# Altium PCB RF Transceiver PCB.PcbDoc
Units mm, origin at the board's own origin, x right, y up, seen from the top; angles counter-clockwise.
Board outline 50.16 x 17.42 mm, 4 copper layers (Top Layer, GND, 3V3, Bottom Layer), stack 0.603 mm thick; 40 components, 34 nets, 171 pads, 62 vias.
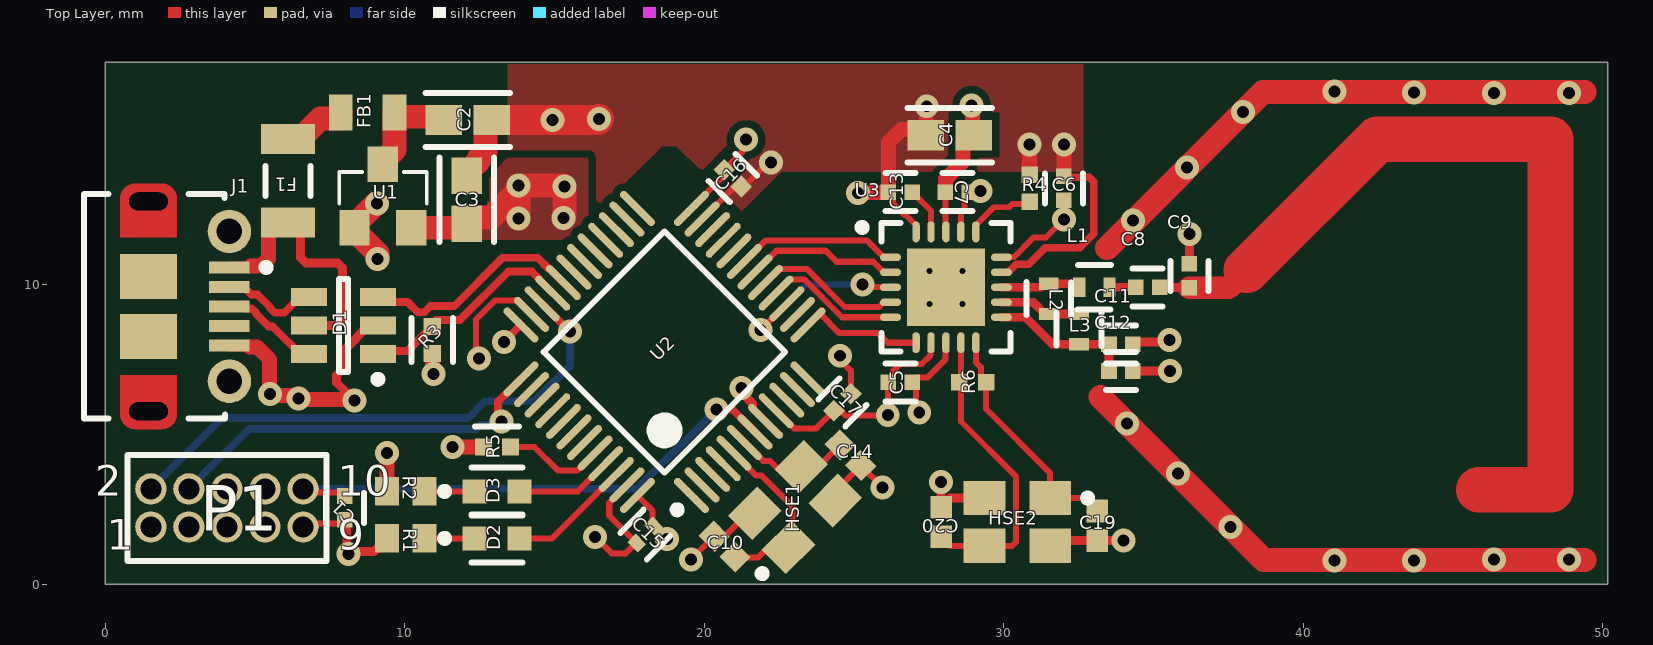
[diagram p0: Top Layer view]
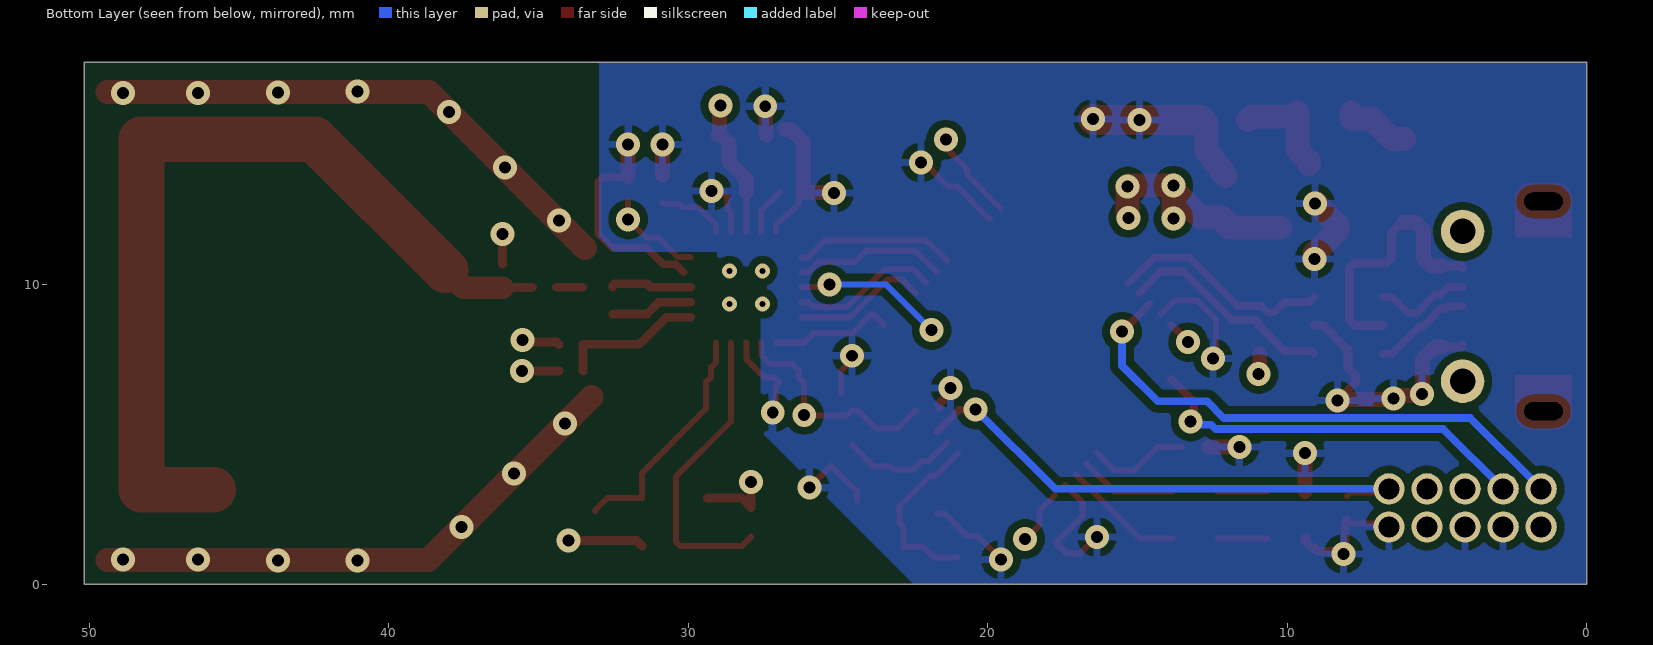
[diagram p1: Bottom Layer view, seen from below]
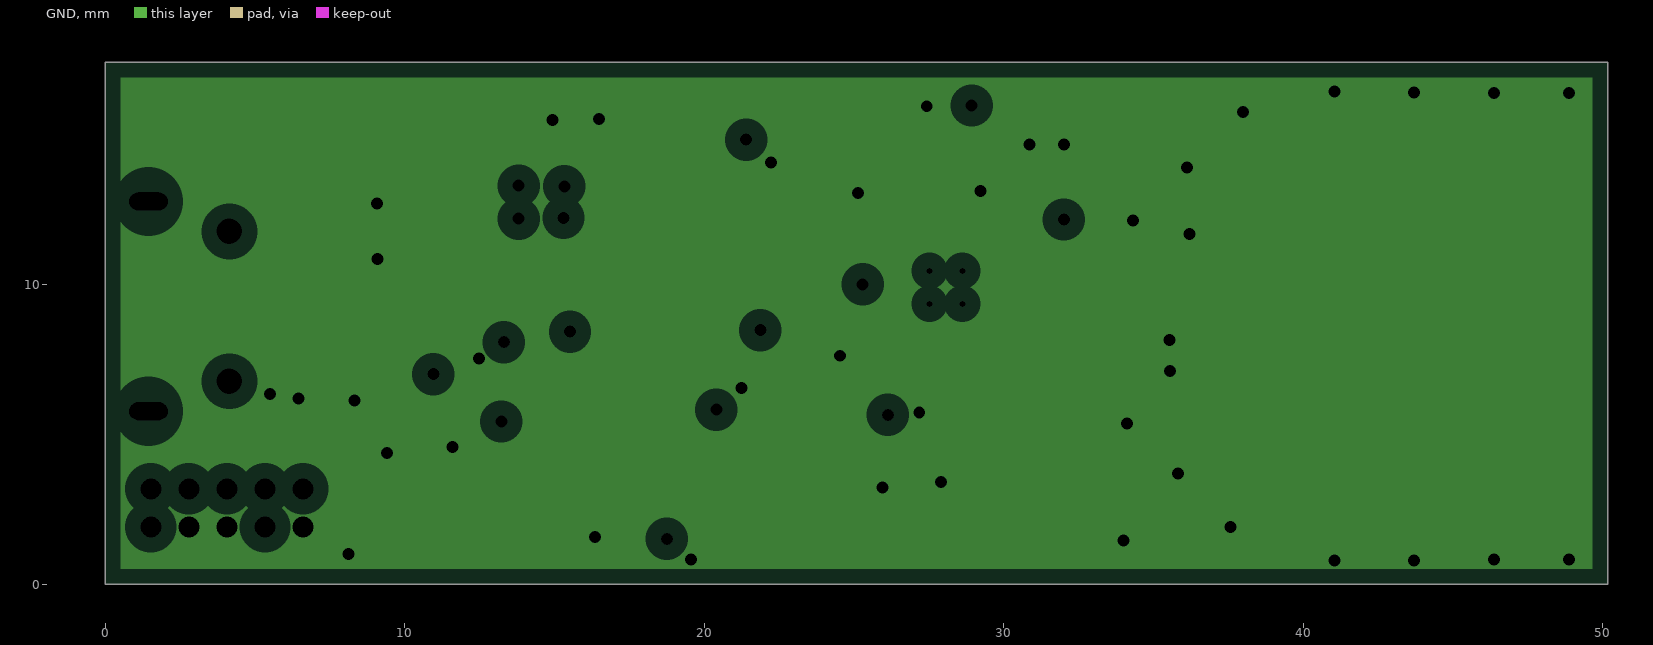
[diagram p2: GND, clearances drawn from the general rule]
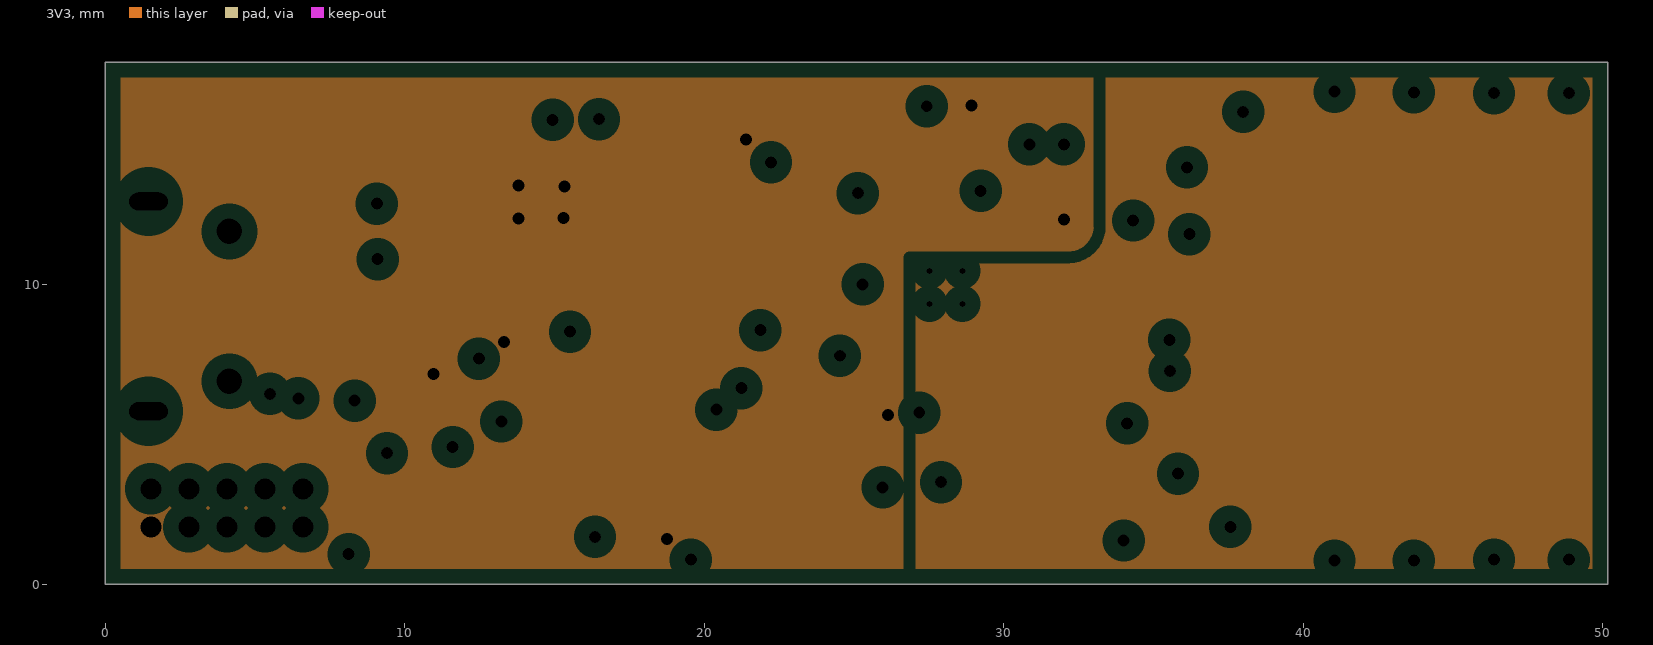
[diagram p3: 3V3, clearances drawn from the general rule]
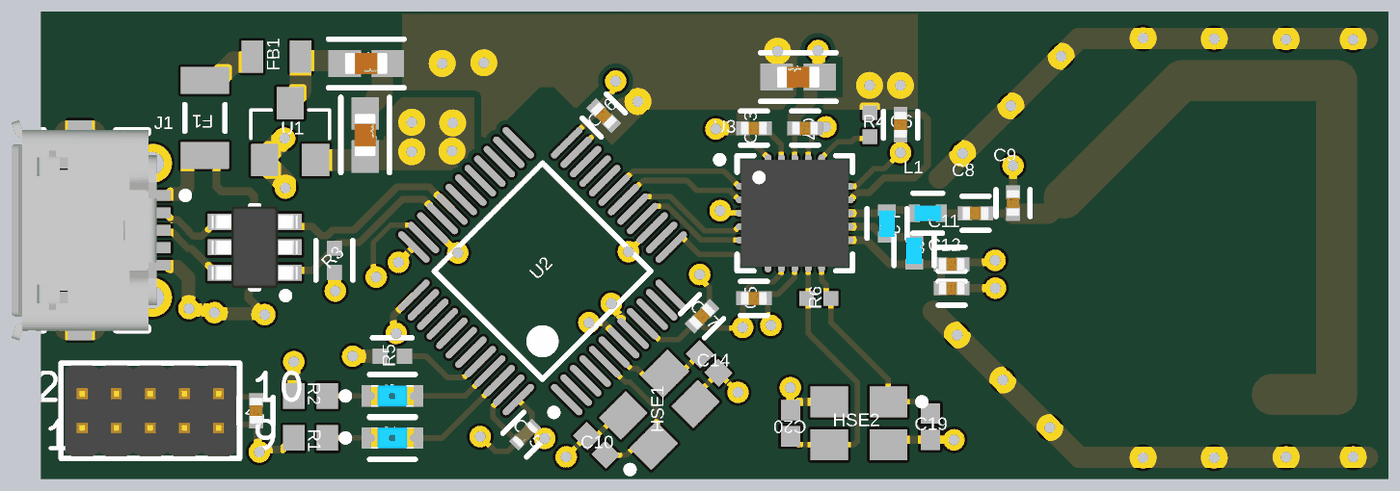
[diagram p4: 3D render of the assembled board from above, using the file's embedded part models]

## Layer stack, top to bottom
Top Solder: solder mask 0.0102, Solder Resist, Dk 3.5
Top Layer: signal copper 0.0356
Dielectric 2: prepreg 0.0711, PP-006, Dk 4.1
GND: plane copper 0.035, net GND
Dielectric 1: dielectric 0.32, FR-4, Dk 4.8
3V3: plane copper 0.035, net +3.3
Dielectric 3: prepreg 0.0711, PP-006, Dk 4.1
Bottom Layer: signal copper 0.0356
Bottom Solder: solder mask 0.0102, Solder Resist, Dk 3.5

## Board outline
0,0 50.165,0 50.165,17.425 0,17.425

## Design rules (kind name [scope] priority, off if disabled: settings)
Clearance Clearance_3 [InNamedPolygon('GND_L04_P001')] p1: gap=0.254 ignorepadtopadclearanceinfootprint=FALSE except(0: Arc-Hole Track-Hole SMDPad-Hole THPad-Hole Via-Hole Fill-Hole Poly-Hole Region-Hole Text-Hole)
Clearance Clearance_2 [InNamedPolygon('GND_L01_P002')] p2: gap=0.254 ignorepadtopadclearanceinfootprint=FALSE except(0: Arc-Hole Track-Hole SMDPad-Hole THPad-Hole Via-Hole Fill-Hole Poly-Hole Region-Hole Text-Hole)
Clearance Clearance_1 [InNamedPolygon('+3.3_L01_P000')] p3: gap=0.254 ignorepadtopadclearanceinfootprint=FALSE except(0: Arc-Hole Track-Hole SMDPad-Hole THPad-Hole Via-Hole Fill-Hole Poly-Hole Region-Hole Text-Hole)
Clearance [All] p4 off: gap=0.24 ignorepadtopadclearanceinfootprint=TRUE except(0: Arc-Hole Track-Hole SMDPad-Hole THPad-Hole Via-Hole Fill-Hole Poly-Hole Region-Hole Text-Hole)
DiffPairsRouting DiffPair_DiffPairsRouting [InDifferentialPairClass('D2')] p1: maxlimit=0.203 minlimit=0.203 mostfreqgap=0.203 toplayer_minwidth=0.261 toplayer_maxwidth=0.261 toplayer_prefwidth=0.261 bottomlayer_minwidth=0.261 bottomlayer_maxwidth=0.261 bottomlayer_prefwidth=0.261 maxuncoupledlength=12.7
DiffPairsRouting DiffPair_D2DiffPairsRouting [InDifferentialPairClass('D2')] p2: maxlimit=0.203 minlimit=0.203 mostfreqgap=0.203 toplayer_minwidth=0.261 toplayer_maxwidth=0.261 toplayer_prefwidth=0.261 bottomlayer_minwidth=0.261 bottomlayer_maxwidth=0.261 bottomlayer_prefwidth=0.261 maxuncoupledlength=12.7
DiffPairsRouting DiffPair_DDiffPairsRouting [InDifferentialPairClass('D')] p3: maxlimit=0.203 minlimit=0.203 mostfreqgap=0.203 toplayer_minwidth=0.261 toplayer_maxwidth=0.261 toplayer_prefwidth=0.261 bottomlayer_minwidth=0.261 bottomlayer_maxwidth=0.261 bottomlayer_prefwidth=0.261 maxuncoupledlength=12.7
MatchedLengths DiffPair_MatchedLengths [InDifferentialPairClass('D2')] p1: tolerance=25.4 checknetsindiffpair=FALSE checkdiffpairvsdiffpair=TRUE checkxsignals=TRUE checkothers=TRUE
MatchedLengths DiffPair_D2MatchedLengths [InDifferentialPairClass('D2')] p2: tolerance=25.4 checknetsindiffpair=FALSE checkdiffpairvsdiffpair=TRUE checkxsignals=TRUE checkothers=TRUE
MatchedLengths DiffPair_DMatchedLengths [InDifferentialPairClass('D')] p3: tolerance=25.4 checknetsindiffpair=FALSE checkdiffpairvsdiffpair=TRUE checkxsignals=TRUE checkothers=TRUE
PlaneClearance [All] p1: clearance=0.508
PlaneConnect [All] p1: planeconnectstyle=Relief reliefexpansion=0.508 reliefentries=4 reliefconductorwidth=0.254 reliefairgap=0.254
PolygonConnect PolygonConnect_11 [All vs IsNamedPolygon('GND_L04_P001')] p1: connectstyle=Relief reliefconductorwidth=0.254 reliefentries=4 polygonreliefangle="90 Angle" airgapwidth=0.254
PolygonConnect PolygonConnect_10 [All vs IsNamedPolygon('GND_L01_P002')] p2: connectstyle=Direct reliefconductorwidth=0.254 reliefentries=4 polygonreliefangle="90 Angle" airgapwidth=0.254
PolygonConnect PolygonConnect_9 [All vs IsNamedPolygon('GND_L01_P002')] p3: connectstyle=Direct reliefconductorwidth=0.254 reliefentries=4 polygonreliefangle="90 Angle" airgapwidth=0.254
PolygonConnect PolygonConnect_8 [All vs IsNamedPolygon('+3.3_L01_P000')] p4: connectstyle=Direct reliefconductorwidth=0.254 reliefentries=4 polygonreliefangle="90 Angle" airgapwidth=0.254
PolygonConnect PolygonConnect_7 [All vs IsNamedPolygon('+3.3_L01_P000')] p5: connectstyle=Relief reliefconductorwidth=0.254 reliefentries=4 polygonreliefangle="90 Angle" airgapwidth=0.254
PolygonConnect PolygonConnect_6 [All vs IsNamedPolygon('GND_L01_P002')] p6: connectstyle=Relief reliefconductorwidth=0.254 reliefentries=4 polygonreliefangle="90 Angle" airgapwidth=0.254
PolygonConnect PolygonConnect_5 [All vs IsNamedPolygon('GND_L01_P002')] p7: connectstyle=Direct reliefconductorwidth=0.254 reliefentries=4 polygonreliefangle="90 Angle" airgapwidth=0.254
PolygonConnect PolygonConnect_4 [All vs IsNamedPolygon('+3.3_L01_P000')] p8: connectstyle=Direct reliefconductorwidth=0.254 reliefentries=4 polygonreliefangle="90 Angle" airgapwidth=0.254
PolygonConnect PolygonConnect_3 [All vs IsNamedPolygon('GND_L01_P001')] p9: connectstyle=Direct reliefconductorwidth=0.254 reliefentries=4 polygonreliefangle="90 Angle" airgapwidth=0.254
PolygonConnect PolygonConnect_2 [All vs IsNamedPolygon('+3.3_L01_P000')] p10: connectstyle=Relief reliefconductorwidth=0.254 reliefentries=4 polygonreliefangle="90 Angle" airgapwidth=0.254
PolygonConnect PolygonConnect_1 [All vs IsNamedPolygon('+3.3_L01_P000')] p11: connectstyle=Direct reliefconductorwidth=0.254 reliefentries=4 polygonreliefangle="90 Angle" airgapwidth=0.254
PolygonConnect [All] p12: connectstyle=Relief reliefconductorwidth=0.254 reliefentries=4 polygonreliefangle="90 Angle" airgapwidth=0.254
RoutingVias [All] p1: holewidth=0.4 width=0.8 viastyle="Through Hole" minholewidth=0.4 minwidth=0.7 maxholewidth=0.4 maxwidth=0.8
SilkToSilkClearance [All] p1 off: silktosilkclearance=0.254
SilkToSolderMaskClearance [IsPad] p1 off: minsilkscreentomaskgap=0.254 clearancetoexposedcopper=TRUE
SolderMaskExpansion [All] p1: expansion=0.102 istentingtop=FALSE
UnRoutedNet [All] p1: checkbadconnections=TRUE
Width [All] p1: maxlimit=1.524 minlimit=0.1 preferedwidth=0.293 minimp=50.000000 maximp=50.000000 favimp=50.000000
24 further rules are at their usual default settings.

## Classes and differential pairs
differential pair class D: D
differential pair class D2: USB
differential pair USB: +USB_P -USB_N
differential pair D: +D_P -D_N

## Components (designator, comment, footprint, x,y, rotation, side; value= is the part's Value field where it differs from the comment)
C1 "100n 0402" FP-C0402-BB-MFG 8.001,2.54 r270 top value="0.10 μF"
C2 "10u 0603" FP-GRM188-0_1-e0_2_0_55-IPC_A 12.105,15.494 r0 top
C3 "10u 0603" FP-GRM188-0_1-e0_2_0_55-IPC_A 12.065,12.827 r90 top
C4 "10u 0603" FP-GRM188-0_1-e0_2_0_55-IPC_A 28.194,14.986 r180 top
C5 "10n 0402" FP-C0402-BB-MFG 26.543,6.731 r0 top value="0.10 μF"
C6 "10n 0402" FP-C0402-BB-MFG 32.004,13.208 r90 top value="0.10 μF"
C7 "10n 0402" FP-C0402-BB-MFG 28.448,13.081 r0 top value="0.10 μF"
C8 "1.5p 0402" FP-C0402-BB-MFG 34.798,9.906 r0 top value="0.10 μF"
C9 "1.0p 0402" FP-C0402-BB-MFG 36.195,10.287 r90 top value="0.10 μF"
C10 "12pf 0402" CAPC1005X55X25ML05T10 20.675,1.25 r315 top
C11 "2.2n 0402" FP-C0402-BB-MFG 33.909,8.001 r0 top value="0.10 μF"
C12 "4.7n 0402" FP-C0402-BB-MFG 33.909,7.112 r0 top value="0.10 μF"
C13 "33n 0402" FP-C0402-BB-MFG 26.543,13.081 r180 top value="0.10 μF"
C14 "12pf 0402" CAPC1005X55X25ML05T10 24.875,4.3 r135 top
C15 "1u 0402" FP-GRM15-0_1-MFG 18.025,1.65 r225 top value=1uF
C16 "100n 0402" FP-C0402-BB-MFG 20.95,13.55 r315 top value="0.10 μF"
C17 "100n 0402" FP-C0402-BB-MFG 24.609,6.067 r45 top value="0.10 μF"
C19 "12pf 0402" CAPC1005X55X25ML05T10 33.114,1.945 r90 top
C20 "12pf 0402" CAPC1005X55X25ML05T10 27.907,2.072 r270 top
D1 "USBLC6-2SC6" STM-SOT23-6L_V 7.95,8.636 r180 top
D2 "LED 0603" FP-LTST-C191TBKT-MFG 13.081,1.524 r0 top
D3 "LED 0603" FP-LTST-C191TBKT-MFG 13.081,3.091 r0 top
F1 "1206L012WR" LFUS-1206L012WR_V 6.096,13.462 r90 top
FB1 "MPZ2012S101A" TDK-MPZ2012S101A-2_V 8.763,15.748 r0 top
HSE1 "X322516MLB4SI" EPSON-TSX-3225_V 23.025,2.575 r45 top
HSE2 "X322516MLB4SI" EPSON-TSX-3225_V 30.447,2.072 r180 top
J1 "105017-0001" USB-MICRO-B_V 2.794,9.271 r270 top
L1 "3.9nH 0402" FP-LQW15AN_80-MFG 33.02,9.906 r0 top
L2 "8.2nH 0402" FP-LQW15AN_80-MFG 31.496,9.522 r270 top
L3 "2.7nH 0402" FP-LQW15AN_80-MFG 32.512,8.509 r90 top
P1 "62201021121" 62201021121 4.064,2.54 r0 top
R1 "2.2k 0603" RESC1609X50X30NL10T20 10.033,1.524 r180 top
R2 "2.2k 0603" RESC1609X50X30NL10T20 10.033,3.091 r180 top
R3 "1.5k 0402" FP-CRCW0402-e3-IPC_B 10.918,8.15 r270 top
R4 "22k 0402" RESC1005X40X25NL05T05 30.861,13.208 r90 top
R5 "10k 0402" FP-CRCW0402-e3-IPC_B 13.075,4.575 r0 top
R6 "1M 0402" RESC1005X40X25NL05T05 28.956,6.731 r180 top
U1 "XC6206P332MR" SOT-23 9.271,12.954 r0 top
U2 "STM32L151C8T6" STM-LQFP48_L 18.669,7.747 r135 top
U3 "NRF24L01P-T" NRSC-QFN-20_L 28.067,9.906 r0 top

## Footprints (in the part's own frame and the unit in brackets; to place one, negate y for a bottom-side part, rotate by r counter-clockwise, add the part's x,y. Pads: shape width x height; smd on the part's side, far side on the other; paste and mask are expansions set on the pad)
62201021121 [mm] "Pin Header, pitch 1.27 mm, THT, Vertical, dual row, 10p"
  round 1.05 hole 0.7: 1(-2.54,-0.635) 2(-2.54,0.635) 3(-1.27,-0.635) 4(-1.27,0.635) 5(0,-0.635) 6(0,0.635) 7(1.27,-0.635) 8(1.27,0.635) 9(2.54,-0.635) 10(2.54,0.635)
  silkscreen extent -3.32,-1.78 3.32,1.78, body extent -3.17,-1.7 3.18,1.7, height 5.33
CAPC1005X55X25ML05T10 [mm] "Chip Capacitor, 2-Leads, Body 1.00x0.50mm, IPC Low Density"
  rect 0.76x0.72 smd: 1(-0.49,0) 2(0.49,0)
  body extent -0.53,-0.28 0.53,0.27, height 0.55
EPSON-TSX-3225_V [mm] "SMD, 4-Leads, Body 3.2x2.5mm"
  rect 1.4x1.15 smd: 1(-1.1,-0.8) 2(1.1,-0.8) 3(1.1,0.8) 4(-1.1,0.8)
  silkscreen extent -2.47,-0.92 -2.23,-0.68, body extent -1.6,-1.25 1.6,1.25, height 0.6
FP-C0402-BB-MFG [mm]
  rect 0.52x0.52 smd paste+0 mask+0: 1(-0.4,0) 2(0.4,0)
  silkscreen extent -0.5,-0.63 0.5,0.64, body extent -0.8,-0.4 0.8,0.4, height 0.25
FP-CRCW0402-e3-IPC_B [mm]
  rect 0.568x0.572 smd paste+0 mask+0: 1(-0.452,0) 2(0.452,0)
  silkscreen extent -0.74,-0.69 0.74,0.69
FP-GRM15-0_1-MFG [mm]
  rect 0.4x0.5 smd paste+0 mask+0: 1(-0.4,0) 2(0.4,0)
  silkscreen extent -0.55,-0.63 0.55,0.63, body extent -0.7,-0.38 0.7,0.38, height 0.25
FP-GRM188-0_1-e0_2_0_55-IPC_A [mm]
  rect 1.208x1.012 smd paste+0 mask+0: 1(-0.802,0) 2(0.802,0)
  silkscreen extent -1.41,-0.91 1.41,0.91, body extent -1.91,-1.01 1.91,1.01, height 0.25
FP-LQW15AN_80-MFG [mm]
  rect 0.41x0.66 smd paste+0 mask+0: 1(-0.505,0) 2(0.505,0)
  silkscreen extent -0.56,-0.74 0.55,0.75, body extent -0.81,-0.45 0.81,0.45, height 0.25
FP-LTST-C191TBKT-MFG [mm]
  rect 0.8x0.8 smd paste+0 mask+0: 1(-0.75,0) 2(0.75,0)
  silkscreen extent -1.87,-0.8 0.85,0.8, body extent -1.25,-0.55 1.25,0.55, height 0.25
LFUS-1206L012WR_V [mm] "SMD, 2-Leads, Body 3.2x1.65mm"
  rect 1x1.8 smd: 1(-1.4,0) 2(1.4,0)
  silkscreen extent -0.5,-0.75 0.5,0.75, body extent -1.6,-0.82 1.6,0.82, height 1.45
NRSC-QFN-20_L [mm] "QFN, 20-Leads, Body 4x4mm, Pitch 0.5mm, Thermal Pad 2.6x2.6mm, IPC High Density"
  oval 0.7x0.25 smd: 1(-1.85,1) 2(-1.85,0.5) 3(-1.85,0) 4(-1.85,-0.5) 5(-1.85,-1) 11(1.85,-1) 12(1.85,-0.5) 13(1.85,0) 14(1.85,0.5) 15(1.85,1)
  oval 0.25x0.7 smd: 6(-1,-1.85) 7(-0.5,-1.85) 8(0,-1.85) 9(0.5,-1.85) 10(1,-1.85) 16(1,1.85) 17(0.5,1.85) 18(0,1.85) 19(-0.5,1.85) 20(-1,1.85)
  rect 2.6x2.6 smd: 21(0,0)
  silkscreen extent -2.92,-2.15 2.15,2.15, body extent -2,-2 2,2, height 0.95
RESC1005X40X25NL05T05 [mm] "Chip Resistor, 2-Leads, Body 1.00x0.50mm, IPC Medium Density"
  rect 0.55x0.55 smd: 1(-0.45,0) 2(0.45,0)
  body extent -0.53,-0.27 0.53,0.28, height 0.4
RESC1609X50X30NL10T20 [mm] "Chip Resistor, 2-Leads, Body 1.55x0.85mm, IPC Medium Density"
  rect 0.8x0.95 smd: 1(-0.625,0) 2(0.625,0)
  body extent -0.82,-0.48 0.82,0.48, height 0.5
SOT-23 [mm]
  rect 1.016x1.2 smd: 1(-0.95,-1.06) 2(0.95,-1.06) 3(0,1.06)
  silkscreen extent -1.46,-0.25 1.46,0.8
STM-LQFP48_L [mm] "QFP, 48-Leads, Body 7x7mm, Pitch 0.5mm, IPC High Density"
  oval 1.55x0.25 smd: 1(-4.025,2.75) 2(-4.025,2.25) 3(-4.025,1.75) 4(-4.025,1.25) 5(-4.025,0.75) 6(-4.025,0.25) 7(-4.025,-0.25) 8(-4.025,-0.75) 9(-4.025,-1.25) 10(-4.025,-1.75) 11(-4.025,-2.25) 12(-4.025,-2.75) 25(4.025,-2.75) 26(4.025,-2.25) 27(4.025,-1.75) 28(4.025,-1.25) 29(4.025,-0.75) 30(4.025,-0.25) 31(4.025,0.25) 32(4.025,0.75) 33(4.025,1.25) 34(4.025,1.75) 35(4.025,2.25) 36(4.025,2.75)
  oval 0.25x1.55 smd: 13(-2.75,-4.025) 14(-2.25,-4.025) 15(-1.75,-4.025) 16(-1.25,-4.025) 17(-0.75,-4.025) 18(-0.25,-4.025) 19(0.25,-4.025) 20(0.75,-4.025) 21(1.25,-4.025) 22(1.75,-4.025) 23(2.25,-4.025) 24(2.75,-4.025) 37(2.75,4.025) 38(2.25,4.025) 39(1.75,4.025) 40(1.25,4.025) 41(0.75,4.025) 42(0.25,4.025) 43(-0.25,4.025) 44(-0.75,4.025) 45(-1.25,4.025) 46(-1.75,4.025) 47(-2.25,4.025) 48(-2.75,4.025)
  silkscreen extent -4.15,-2.85 2.85,3.55, body extent -3.5,-3.5 3.5,3.5, height 1.6
STM-SOT23-6L_V [mm] "SOT23, 6-Leads, Body 3.05x1.75mm, Pitch 0.95mm"
  rect 1.2x0.6 smd: 1(-1.15,0.95) 2(-1.15,0) 3(-1.15,-0.95) 4(1.15,-0.95) 5(1.15,0) 6(1.15,0.95)
  silkscreen extent -1.28,-1.55 0.15,1.92, body extent -1.6,-1.53 1.6,1.53, height 1.45
TDK-MPZ2012S101A-2_V [mm] "Chip Bead, 2-Leads, Body 2.2x1.45mm"
  rect 0.8x1.2 smd: 1(-0.9,0) 2(0.9,0)
  body extent -1.1,-0.73 1.1,0.73, height 1.05
USB-MICRO-B_V [mm] "USB, MICRO B, Body 7.491x4.695 mm, Pitch 0.65 mm"
  rect 0.4x1.35 smd: 1(-1.3,1.35) 2(-0.65,1.35) 3(0,1.35) 4(0.65,1.35) 5(1.3,1.35)
  round 1.45 hole 0.85: 6(-2.5,1.35) 7(2.5,1.35)
  rrect50% 0x0 hole 0.6 slot 1.3 at 90 deg: 8(-3.5,-1.35) 11(3.5,-1.35)
  rect 1.5x1.9 smd: 9(-1,-1.35) 10(1,-1.35)
  Top Layer circle w0.5: c-3.6,-1.8 r0.25
  Top Layer circle w0.5: c-3.6,-0.9 r0.25
  Top Layer circle w0.5: c3.6,-1.8 r0.25
  Top Layer circle w0.5: c3.6,-0.9 r0.25
  Top Layer region: -3.6,-1.8 -3.6,-0.9 -4.1,-0.9 -4.1,-1.8
  Top Layer region: 3.6,-0.9 3.6,-1.8 4.1,-1.8 4.1,-0.9
  Top Layer region: 2.3,-0.4 2.3,-2.3 3.6,-2.3 3.6,-0.4
  Top Layer region: -2.3,-2.3 -2.3,-0.4 -3.6,-0.4 -3.6,-2.3
  silkscreen extent -3.75,-3.5 3.75,2.7, body extent -4.1,-3.9 4.1,1.5, height 2.67

## Part data
C1 C5 C6 C7 C8 C9 C11 C12 C13 C16 C17: library part CMP-2008-02046-2, "CAP CER 0.1UF 10V X5R 0402", Capacitance="0.10 μF", Manufacturer=Kemet, Manufacturer Part Number=C0402C104K8PACTU, Package=C0402-BB, Temperature="-55°C to +125°C", Temperature Characteristic=X5R, Temperature Coefficient=15%, Temperature Range High=+125°C, Temperature Range Low=-55°C, Tolerance=0.1, Voltage Rating="10 V", Automotive=No, Category=Cap, ComponentLink2Description=Datasheet, ComponentLink2URL=https://content.kemet.com/datasheets/KEM_C1002_X7R_SMD.pdf, Device Class L1="Passive Components", Device Class L2=Capacitors, Device Class L3="Ceramic Capacitors", Digikey Description="CAP CER 0.1UF 10V X5R 0402", Height=0.55mm, Ipc Land Pattern Name=CAPC10050X50, Lead Free=Yes, Material=Ceramic, Mouser Description="Capacitor 100 nF 10 VDC 0402", Octopart=https://octopart.com/c0402c104k8pactu-kemet-140039, RoHS=TRUE
C2 C3 C4: library part CMP-2006-02792-2, "Chip Multilayer Ceramic Capacitors for General Purpose, 0603, 10uF, X5R, 15%, 20%, 6.3V", Capacitance=10uF, Case Code (Imperial)=0603, Case Code (Metric)=1608, Dielectric=X5R, Max Operating Temperature=85°C, Min Operating Temperature=-55°C, Package Quantity=4000, Tolerance=20%, Voltage=6.3V, Case/Package=0603, Depth=0.8mm, Height=0.8mm, Lead Free="Lead Free", Length=1.6mm, Material=Ceramic, Mount="Surface Mount", Packaging="Tape and Reel", Radiation Hardening=No, REACH SVHC="No SVHC", Termination=SMD/SMT, Thickness=0.035inch, Voltage Rating=6.3V, Voltage Rating (DC)=6.3V, Width=0.031inch
C10 C14 C19 C20: library part CMP-2008-03945-1, Manufacturer=Murata, Part Number=GRM1555C1H120GA01D
C15: library part CMP-2008-04556-2, "CAP CER 1UF 10V X5R 0402", Capacitance=1uF, Manufacturer=Murata, Manufacturer Part Number=GRM155R61A105KE15D, Package=GRM15-0.1, Temperature="-55°C to +85°C", Temperature Characteristic=X5R, Temperature Coefficient=15%, Temperature Range High=+85°C, Temperature Range Low=-55°C, Tolerance=10%, Voltage Rating=10V, Automotive=No, Category=Cap, ComponentLink2Description=Datasheet, ComponentLink2URL=https://search.murata.co.jp/Ceramy/image/img/A01X/G101/ENG/GRM155R61A105KE15-01A.pdf, Device Class L1="Passive Components", Device Class L2=Capacitors, Device Class L3="Ceramic Capacitors", Digikey Description="CAP CER 1UF 10V X5R 0402", Height=0.55mm, Ipc Land Pattern Name=CAPC10050X50, Lead Free=Yes, Material=Ceramic, Mouser Description="0402 1 uF 10 V ±10% Tolerance X5R Surface Mount Multilayer Ceramic Capacitor", Octopart=https://octopart.com/grm155r61a105ke15d-murata-197442, RoHS=TRUE
D1: library part CMP-2000-05378-1, "Very low capacitance ESD protection, 3.5 pF, -40 to 125 degC, 6-Pin SOT23, RoHS, Tape and Reel", Capacitance Value=3.5pF, Clamping Voltage=17V, Leakage Current=0.15uA, Manufacturer=STMicroelectronics, Operating Temp Range=-40Cto125C, Operating Temperature Classification=Automotive, Operating Temperature Max Deg. C=125C, Operating Temperature Min Deg. C=-40C, Package / Case=SOT-23, Package Description="6-Pin Small Outline Transistor, Body 2.925 x 1.625 mm, Pitch 0.95 mm", Package Reference=SOT23-6L, Peak Pulse Current=5A, Reverse Breakdown Voltage=6V, Reverse Stand-off Voltage=5V, Test Current (It)=1mA, Clamping Voltage (Max)=17V, Configuration=Dual, Datasheet URL=http://www.st.com/st-web-ui/static/active/en/resource/technical/document/datasheet/CD00050750.pdf, Datasheet Version="Rev. 5, 10/2011", Direction Type=Uni-Directional, Leakage Current (Max)=0.15uA, Manufacturer URL=http://www.st.com/, Mounting=SurfaceMount, Mounting Style=SurfaceMount, Number of Elements=1, Packaging=TapeandReel, Pin Count=6, Polarity=Uni-Directional, Product Depth (mm)=1.75mm, Product Height (mm)=1.3mm, Product Length (mm)=3.05mm, Rad Hardened=No, Suppressor Type=DiodeArrays, Working Voltage=5V, Working Voltage (Max)=5V
D2 D3: library part CMP-22017-000008-1, "LED BLUE CLEAR CHIP SMD", Case Code (Imperial)=0603, Case Code (Metric)=1608, Color=Blue, Forward Current=20mA, Forward Voltage=3.8V, Lens Color=Colorless, Max Operating Temperature=80°C, Max Power Dissipation=75mW, Min Operating Temperature=-20°C, Package Quantity=1, Power Dissipation=76mW, Reverse Voltage=5V, Case/Package=0603, Depth=1.6mm, Dominant Wavelength=475nm, Height=0.55mm, Illumination Color=Blue, Lead Free="Lead Free", Length=0.8mm, Lens Style=Diffused, Lens Transparency=Clear, Luminous Intensity=180mcd, Mount="Surface Mount", Number of Elements=1, Number of LEDs=1, Number of Pins=2, Packaging="Tape and Reel", Radiation Hardening=No, Test Current=20mA, Viewing Angle=130°, Wavelength=468nm, Width=0.8mm
F1: library part CMP-2000-05470-1, "POLY-FUSE(R) Resettable PTC, 30 V, -40 to 85 degC, 2-Pin SMD, RoHS, Tape and Reel", Hold Current [Ih]=0.125A, Manufacturer=Littelfuse, Operating Temp Range=-40to+85°C, Package Description="2-Pin Surface Mount Device, Body 3.2 x 1.65 mm", Package Reference=1206, Trip Current=0.29A, Working Voltage-Max=30V, Datasheet URL=https://datasheet.ciiva.com/26787/1206l012wr-26787215.pdf, Datasheet Version=04/2012, Manufacturer URL=http://www.littelfuse.com/, Mounting Technology=SurfaceMount, Size=1206
FB1: library part CMP-2000-05399-1, "Chip Bead for Power Line, 100 Ohm, +/- 25%, 4 A, -55 to 125 degC, 0805 (2012 Metric), RoHS, Tape and Reel", Case Height=0.85mm, Case Length=2mm, Case Width=1.25mm, Manufacturer=TDK, Maximum DC Current=4A, Maximum DC Resistance=20mOhms, Operating Temperature Range=-55Cto+125C, Package / Case=0805(2012metric), Package Description="2-Pin Surface Mount Device, Body 2 x 1.25 mm", Package Reference=MPZ2012S101A-2, Test Frequency=100MHz, Tolerance=25%, Brand=TDK, Datasheet URL=http://www.farnell.com/datasheets/1750041.pdf, Datasheet Version=Jul-13, Dimensions=1.25mmWx2mmLx0.85mmH, Factory Pack Quantity=4000, Impedance=100Ohms, Manufacturer URL=http://www.tdk.com/, Packaging=Reel, Product=FerriteChipBeads, Product Category=EMIFilterBeads,Chips&Arrays, RoHS=Details, Termination Style=SMD/SMT
HSE1 HSE2: library part CMP-2000-07331-1, "Crystal, 16 MHz, -40 to 85 degC, 4-Pin SMD, RoHS, Tape and Reel", Frequency=16MHz, Frequency Stability=10PPM, Load Capacitance=9pF, Manufacturer=Epson, Operating Temperature Range=-20Cto+75C, Package / Case=3.2mmx2.5mm, Package Description="4-Pin Surface Mount Device, Body 3.2 x 2.5 mm", Package Reference=TSX-3225, Brand=EpsonTiming, Datasheet URL=https://support.epson.biz/td/api/doc_check.php?dl=brief_FA-238V_en.pdf, Datasheet Version=12/2015, Drive Level=200uW, ESR=60Ohms, Factory Pack Quantity=250, Height=0.6mm, Length=3.2mm, Manufacturer URL=https://www.eea.epson.com/, Mounting Style=SMD/SMT, Mounting Technology=SurfaceMount, Packaging=Reel, Product Category=Crystals, RoHS=True, Series=TSX-3225, Termination Style=SMD/SMT, Tolerance=10PPM, Type=Crystal, Unit Weight=0.000564oz, Width=2.5mm
J1: library part CMP-2000-05827-1, "Micro-USB B Receptacle, Right Angle, Bottom Mount, Surface Mount, with Solder Tabs, -30 to 85 degC, 5-Pin USB, RoHS, Tape and Reel", Manufacturer=Molex, Package Description="5-Leads USB, Micro B, Body 7.5 x 5 mm, Pitch 0.65 mm", Package Reference=MICRO-B, Package Version="Rev. F, 12/2012", Standard Package=1, Voltage - Max=30V, 3D Model=105017-0001.stp, Catalog Drawings=1050170001, Category=Connectors,Interconnects, Circuits=5, Connector Type=USB-microB, Datasheet URL=http://www.molex.com/elqNow/elqRedir.htm?ref=http://www.molex.com/webdocs/datasheets/pdf/en-us/1050170001_IO_CONNECTORS.pdf, Datasheet Version=03/2016, Family=USB,DVI,HDMIConnectors, Featured Product=Micro-USBConnectorsUSBConnectors, Features=Shielded,SolderRetention, Gender=Receptacle, Ingress Protection=-, Manufacturer URL=http://www.molex.com/, Mating Products=WM17145-ND-CABLEMICROUSBBTOSTDA1.0MWM17147-ND-CABLEMICROUSBBTOSTDA2.0MWM17146-ND-CABLEMICROUSBBTOSTDA1.5M, Mounting Technology=SurfaceMount, Mounting Type=BoardCutout,SurfaceMount,RightAngle, Number of Contacts=5, Online Catalog=Molex-MicroUSB, Other Names=WM1399DKR, Package URL=http://www.molex.com/pdm_docs/sd/1050170001_sd.pdf, Packaging=Digi-Reel®, PCN Assembly/Origin=ResinSupplier21/Oct/2015, RoHS Information=1050170001CertofCompliance, Series=-, Specifications=-
L1 L2 L3: library part CMP-06042-006817-1, "Wire Wound RF Inductor for Automotive 3.4nH ±0.5nH 1950mA 0.03Ω 0402 (1005)"
P1: library part CMP-1502-00948-1, "THT Vertical Pin Header WR-PHD, Pitch 1.27 mm, Dual Row, 10 pins", Contact Resistance=20mOhm, Manufacturer="Wurth Elektronik", Operating Temperature=-40to105degC, Rated Current=1A, Withstanding Voltage=500VAC, Working Voltage=100VAC, Datasheet URL=https://katalog.we-online.de/em/datasheet/62201021121.pdf, Gender=Male, Manufacturer URL=http://www.we-online.de, Mounting Technology=THT, Orientation=Vertical, Package Reference=62201021121, Packaging=Box, Part Number=62201021121, Pin Number=10, Pitch=1.27mm, Publisher=WurthElektronik, Row Number=Dual
R1 R2: library part CMP-2000-03167-1, Manufacturer="Vishay Dale", Part Number=CRCW06032K20FKEA
R3 R5: library part CMP-2002-08135-2, "RES SMD 10K OHM 1% 1/16W 0402", Case Code (Imperial)=0402, Case Code (Metric)=1005, Max Operating Temperature=155°C, Max Power Dissipation=63mW, Min Operating Temperature=-55°C, Package Quantity=10, Resistance=10kR, Temperature Coefficient=100ppm/°C, Tolerance=1%, Voltage Rating=50V, Case/Package=0402, Composition="Thick Film", Contact Plating=Tin, Depth=0.5mm, Features="Automotive AEC-Q200", Height=0.35mm, Lead Free="Lead Free", Length=1mm, Military Standard=Not, Mount="Surface Mount", Number of Pins=2, Number of Terminations=2, Packaging="Tape and Reel", Power Rating=63mW, Radiation Hardening=No, Termination=SMD/SMT, Voltage Rating (DC)=50V, Weight=2.3E-05oz, Width=0.02inch
R4 R6: library part CMP-1011-00659-2, Manufacturer="Vishay Dale", Part Number=CRCW040222K0FKED
U1: library part PMIC-LDO-XC6206P332MR-G(SOT23), "Linear Voltage Regulator IC 1 Output 200mA SOT-23", Package="SOT-23-3 Torex", Availability=Unavailable, MF=Torex, MP=XC6206P332MR-G, Price=None, SnapEDA_Link=https://www.snapeda.com/parts/XC6206P332MR-G/Torex/view-part/105716/?ref=snap
U2: library part CMP-0236-00023-4, "ARM Cortex-M3 32-bit MCU, 64 KB Flash, 10 KB Internal RAM, 37 I/Os, 48-pin LQFP, -40 to 85 degC, Tray", I/Os (High Current)=37, Operating Frequency(F) (Processor speed) (MHz)=32, Supply Voltage(Vcc) min (V)=1.65, ComponentLink1Description="Manufacturer URL", ComponentLink1URL=http://www.st.com/web/en/home.html, ComponentLink2Description=Datasheet, ComponentLink2URL=http://www.st.com/st-web-ui/static/active/en/resource/technical/document/datasheet/CD00277537.pdf, ComponentLink3Description="Package Specification", ComponentLink3URL=http://www.st.com/st-web-ui/static/active/en/resource/technical/document/datasheet/DM00058181.pdf, Core="ARM Cortex-M3", D/A Converter="2x12-bit (2 Channel)", Data E2PROM nom (B)=4096, DatasheetVersion="Rev. 8", FLASH Size (Prog) (kB)=64, Internal RAM Size (kB)=10, Mounting Technology="Surface Mount", PackageDescription="48-Pin Low Profile Quad Flat Package, 7 x 7 mm Body, 0.5 mm Pitch", PackageReference=LQFP48, PackageVersion="Rev. 6, 06/2013", Packing=Tray, PartNumber=STM32L151C8T6
U3: library part CMP-2000-06859-1, "Single Chip Transceiver, 2.4 GHz, 60 mW, 1.9 to 3.6 V, -40 to 85 degC, 20-Pin QFN, RoHS, Tray", Current - Receiving=12.6mA~13.5mA, Current - Transmitting=7mA~11.3mA, Frequency=2.4GHz, Manufacturer="Nordic Semiconductor", Operating Temperature=-40°C~85°C, Package / Case=20-VFQFNExposedPad, Package Description="20-Pin Quad Flat No-lead Package, Body 4 x 4 mm, Pitch 0.5 mm", Package Reference=QFN20, Power - Output=0dBm, Standard Package=490, Voltage - Supply=1.9V~3.6V, Category=RF/IFandRFID, Data Rate (Max)=2Mbps, Datasheet URL=http://www.nordicsemi.com/eng/content/download/2726/34069/file/nRF24L01P_Product_Specification_1_0.pdf, Datasheet Version="Rev. 1.0, 09/2008", Design Resources=DevelopmentToolSelector, Family=RFTransceiverICs, For Use With=1490-1002-ND-KITEVALUATIONNRF24L01P1568-1295-ND-SPARKFUNTRANSCEIVERBREAKOUT-1568-1296-ND-SPARKFUNTRANSCEIVERBREAKOUT-1471-1410-ND-DEVBOARDNRFSCLICKNRF24L01P-MODULE-PCB-ND-KITEVALNRF24L01+PCBANTENNANRF24L01P-MODULE-SMA-ND-KITEVALNRF24L01+SMACONNNRF24L01P-UPGRADE-ND-UPGRADE2PCB/1SMANRF24L01103990038-ND-DEVDUINOSENSORNODEV1.3103990053-ND-DEVDUINOSENSORNODEV2(ATMEGA103990074-ND-DEVDUINOSENSORNODE106990026-ND-ENERGYMONITORSHIELDV2113990088-ND-WIRELESSGATESHIELD113990095-ND-DEVDUINOSENSORNODEV3(ATMEGA106030001-ND-ENERGYMONITORSHIELD1597-1361-ND-DEVDUINOSENSORNODEV2.2(ATMEG105990030-ND-RGBWSTRIPWIRELESSSHIELDV1.0, GPIO=-, Manufacturer URL=http://www.nordicsemi.com/eng/Products/, Memory Size=-, Modulation=GFSK, Mounting Technology=SurfaceMount, Online Catalog=nRF24L01+, Other Names=1490-1019, Packaging=Tray, Protocol=-, RF Family/Standard=GeneralISM>1GHZ, Sensitivity=-94dBm, Serial Interfaces=SPI, Series=-, Type=TxRxOnly

## Via types
v1: diameter 0.8, hole 0.4, Top Layer to Bottom Layer, 58 vias
v2: diameter 0.5, hole 0.2, Top Layer to Bottom Layer, 4 vias

## Nets (pads, with @x,y where several pads share a name; then routed paths per layer and width w, separated by ;. In a path a pad name is that pad's centre, name@x,y a point inside that pad or via, vN(x,y) a via of type N, cw(c..) or ccw(c..) an arc to the next point about the centre after c; other vN are vias at no path point)
+3.3: C3.1 C4.1 C5.1 C6.1 C7.1 C15.1 C16.1 C17.1 P1.1 R3.2 U1.2 U2.9 U2.24 U2.36 U2.48 U3.7 U3.15 U3.18 | length 30
  Top Layer w0.2: U2.24 19.571,12.551 20.667,13.648 C16.1 21.279,14.445 21.279,14.721 v1(21.394,14.835) ; U2.9 22.413,5.785 22.998,5.2 23.742,5.2 C17.1 24.553,5.784 24.709,5.628 26.104,5.628 v1(26.124,5.648) 26.133,5.658 26.133,6.721 C5.1 26.303,6.891 26.303,7.112 26.543,7.352 27.265,7.352 27.557,7.644 27.557,8.046 U3.7 ; C7.1 28.058,13.072 28.058,11.765 U3.18 ; U3.15 29.923,10.912 30.337,10.912 31,11.575 31.408,11.575 v1(32.004,12.171) C6.1
  Top Layer w0.203: U2.48 18.272,2.451 18.272,1.968 C15.1 18.316,1.933 18.743,1.506 v1(18.752,1.506)
  Top Layer w0.254: v1(13.305,8.075) U2.36
  Top Layer w0.5: R3.2 10.918,7.043 v1(10.953,7.007) ; C7.1 28.058,13.091 28.058,13.524 28.642,14.107 28.642,14.73 28.898,14.986 C4.1 28.96,15.021 28.96,15.94 v1(28.925,15.975)
  Top Layer w0.8: U1.2 11.959,11.894 12.065,12 C3.1 12.065,12.123 12.171,12.229 12.879,12.229 v1@13.8,13.15 ; v1(13.8,12.2) v1@13.8,13.15 ; v1(15.3,12.225) 15.325,12.25 v1(15.325,13.275) 15.3,13.3 v1(13.8,13.3) v1@13.8,13.15
+5: D1.5 F1.1 J1.1 | length 9
  Top Layer w0.3: J1.1 4.194,10.621 4.846,10.621 4.85,10.625 ; F1.1 6.174,12.062 6.524,11.712 6.524,10.901 6.7,10.725 7.749,10.725 7.925,10.549 7.925,8.825 7.736,8.636 D1.5
  Top Layer w0.5: 4.85,10.625 5.211,10.625 5.45,10.864 5.45,11.408 5.446,11.412 5.446,11.812 5.696,12.062 F1.1
Ant: C8.2 C9.1 | length 29.2
  Top Layer w0.293: C8.2 35.207,9.897 36.186,9.897 C9.1
  Top Layer w0.75: C9.1 37.512,9.887 38.1,10.475
  Top Layer w1.524: 38.1,10.475 42.475,14.85 48.25,14.85 48.25,3.15 45.85,3.15
D_N: D1.4 J1.2 | length 3.3
  Top Layer w0.261: J1.2 4.619,9.921 4.874,9.666 5.08,9.666 5.505,9.241 5.505,9.21 5.658,9.057 5.971,9.057 6.5,9.586 D1.4
D_P: D1.6 J1.3 | length 3.3
  Top Layer w0.261: J1.3 4.612,9.271 4.682,9.202 4.888,9.202 5.041,9.049 5.041,9.018 5.466,8.593 5.593,8.593 6.5,7.686 D1.6
GND: C1.2 C2.2 C3.2 C4.2 C5.2 C6.2 C7.2 C9.2 C10.1 C11.2 C12.2 C13.2 C14.1 C15.2 C16.2 C17.2 C19.1 C20.1 D1.2 HSE1.2 HSE1.4 HSE2.2 HSE2.4 J1.5 P1.3 P1.5 P1.9 R1.2 R2.2 R4.2 R5.1 U1.1 U2.8 U2.23 U2.35 U2.47 U3.8 U3.14 U3.17 U3.20 | length 107
  Top Layer w0.2: v1(12.475,7.525) 12.375,7.625 12.375,8.825 13.023,9.473 13.348,9.473 13.349,9.471 13.763,9.471 U2.35 ; v1(19.55,0.818) C10.1 20.676,1.596 21.443,2.363 HSE1.4 ; U2.23 19.938,12.184 21.021,13.267 21.325,13.267 22.133,14.075 v1(22.225,14.075) ; HSE1.2 24.369,3.101 C14.1 v1(25.95,3.225) ; v1(24.525,7.621) 24.525,7.488 24.892,7.121 C17.2 ; C13.2 26.303,12.921 26.303,12.7 26.671,12.332 26.716,12.332 27.067,11.981 U3.20 ; v1(27.175,5.725) 27.06,5.84 27.06,6.571 27.075,6.585 27.089,6.585 C5.2 27.103,6.891 27.446,6.891 28.057,7.502 28.057,8.046 U3.8 ; U3.17 28.567,12.406 28.688,12.527 28.688,12.921 28.892,13.125 v1(29.225,13.125)
  Top Layer w0.203: P1.9 6.722,2.023 7.884,2.023 C1.2 ; v1(16.35,1.575) 16.902,1.023 17.373,1.023 17.66,1.31 17.685,1.31 C15.2 16.827,2.282 16.827,2.711 17.414,3.297 U2.47
  Top Layer w0.254: U3.14@30.14,10.408 30.408,10.676 30.834,10.676 31.383,11.225 32.525,11.225 33,11.7 33,13.426 32.851,13.575 32.037,13.575 C6.2 C6.2@32.002,13.61
  Top Layer w0.293: J1.5 4.197,7.918 4.824,7.918 ; v1@8.287,6.162 7.722,6.728 7.722,6.972 7.975,7.225 7.975,7.811 8.8,8.636 D1.2 ; v1(21.235,6.541) 21.235,6.404 21.616,6.022 U2.8@21.616,5.891 ; C12.2 v1(35.538,7.112) ; C11.2 34.383,8.076 35.451,8.076 v1(35.525,8.15) ; C9.2 v1(36.195,11.68)
  Top Layer w0.3: C1.2 8.063,2.078 8.063,1.062 v1(8.125,1) 8.216,1.091 8.975,1.091 9.083,1.199 9.158,1.199 9.408,1.449 R1.2 R1.2@9.379,1.553 ; v1(27.9,3.4) 27.907,3.393 C20.1@27.907,2.582 ; C20.1 C20.1@27.907,2.582 ; HSE2.2 28.197,2.872 C20.1@27.907,2.582 ; HSE2.4 31.73,1.455 C19.1 v1(33.995,1.455)
  Top Layer w0.5: 4.825,7.917 5.072,7.917 5.489,7.5 5.489,6.361 5.557,6.293 6.276,6.293 6.369,6.2 v1(6.45,6.2) 6.488,6.162 8.287,6.162 v1(8.325,6.125) ; R2.2 v1(9.408,4.367) ; v1(11.6,4.575) R5.1 ; v1(25.125,13.05) 25.146,13.071 26.133,13.071 C13.2 26.143,14.743 26.575,15.175 26.775,15.175 ; C4.2 27.409,15.002 27.409,15.934 v1(27.425,15.95) ; v1(30.85,14.675) 30.855,14.67 30.855,13.664 R4.2 ; v1(32,14.675) 32.002,14.673 C6.2@32.002,13.61
  Top Layer w0.8: v1(9.068,12.7) 9.035,12.7 8.321,11.986 U1.1 8.321,11.802 9.093,11.03 v1(9.093,10.846) ; C3.2 12.171,13.735 12.171,13.833 12.486,14.148 12.486,14.245 12.703,14.462 12.703,15.388 12.809,15.494 C2.2 ; 33.225,6.25 38.675,0.8 49.39,0.8 ; 33.45,11.225 38.65,16.425 ; 38.665,16.425 49.39,16.425
  Top Layer w1: C2.2 v1(14.935,15.494) 16.459,15.494 v1(16.485,15.519)
  other v1: 41.038,0.787 43.688,0.787 46.363,0.812 48.863,0.812 37.563,1.912 35.813,3.687 34.113,5.362 5.5,6.35 34.313,12.137 36.113,13.912 37.988,15.762 46.363,16.387 48.863,16.387 43.688,16.412 41.038,16.437
NetC2_1: C2.1 FB1.2 U1.3 | length 3.6
  Top Layer w0.8: U1.3 9.271,14.106 9.663,14.498 FB1.2@9.663,15.6 ; FB1.2 FB1.2@9.663,15.6 ; C2.1 11.197,15.6 FB1.2@9.663,15.6
NetC8_1: C8.1 L1.2 | length 0.9
  Top Layer w0.293: L1.2 C8.1
NetC10_2: C10.2 HSE1.1 U2.5 | length 6
  Top Layer w0.2: U2.5 21.737,3.618 21.917,3.618 22.937,2.598 22.937,2.027 22.813,1.903 HSE1.1 22.141,1.231 21.799,0.889 21.036,0.889 C10.2
NetC11_1: C11.1 C12.1 L3.1 U3.11 | length 4.9
  Top Layer w0.293: U3.11 30.723,8.906 31.625,8.004 L3.1 32.513,8.003 33.507,8.003 C11.1 C12.1
NetC13_1: C13.1 U3.19 | length 1.6
  Top Layer w0.2: C13.1 27.567,12.457 U3.19
NetC14_2: C14.2 HSE1.3 U2.6 | length 3.9
  Top Layer w0.2: U2.6 21.352,4.724 21.963,4.113 22.194,4.113 22.477,3.83 23.149,3.83 HSE1.3 23.801,3.919 C14.2
NetC19_2: C19.2 HSE2.1 R6.1 U3.10 | length 8
  Top Layer w0.2: U3.10 29.067,7.406 29.231,7.242 29.231,6.906 R6.1 29.406,5.844 31.547,3.703 HSE2.1 32.697,2.872 33.114,2.455 C19.2
NetC20_2: C20.2 HSE2.3 R6.2 U3.9 | length 10.1
  Top Layer w0.2: C20.2 27.907,1.562 28.197,1.272 HSE2.3 30.272,1.272 30.401,1.401 30.401,3.594 28.567,5.428 28.567,6.731 U3.9
NetD2_1: D2.1 R1.1 | length 1.7
  Top Layer w0.2: R1.1 D2.1
NetD2_2: D2.2 U2.46 | length 4.1
  Top Layer w0.2: 15.679,2.283 U2.46
  Top Layer w0.203: D2.2 14.921,1.524 15.679,2.283
NetD3_1: D3.1 R2.1 | length 1.7
  Top Layer w0.2: R2.1 D3.1
NetD3_2: D3.2 U2.45 | length 3.3
  Top Layer w0.203: D3.2 15.781,3.091 U2.45
NetF1_2: F1.2 FB1.1 | length 2.3
  Top Layer w0.8: F1.2 6.496,14.862 7.182,15.548 7.863,15.548 FB1.1
NetL1_1: L1.1 L2.1 U3.13 | length 2.7
  Top Layer w0.293: U3.13 31.25,9.906 31.371,10.027 L2.1 32.457,10.027 32.515,9.969 L1.1
NetL2_2: L2.2 L3.2 U3.12 | length 2.8
  Top Layer w0.293: U3.12 30.982,9.406 31.371,9.017 L2.2 31.498,9.015 32.511,9.015 L3.2
NetR4_1: R4.1 U3.16 | length 2.3
  Top Layer w0.2: U3.16 29.067,11.981 29.664,12.578 30.173,12.578 30.286,12.692 30.795,12.692 R4.1
NetR5_2: R5.2 U2.44 | length 3.4
  Top Layer w0.203: R5.2 14.329,4.575 15.12,3.784 15.754,3.784 16.341,4.371 U2.44
NRF_CE: U2.19 U3.1 | length 5.4
  Top Layer w0.203: U2.19 22.043,11.475 25.423,11.475 25.992,10.906 U3.1
NRF_IRQ: U2.13 U3.6 | length 4.2
  Top Layer w0.203: U2.13 23.832,9.021 23.863,9.021 24.507,8.377 25.811,8.377 26.132,8.056 U3.6
NRST: C1.1 P1.10 U2.7 | length 18
  Top Layer w0.2: P1.10 6.722,3.057 7.883,3.057 C1.1
  Top Layer w0.254: v1(20.4,5.825) 20.411,5.814 20.956,5.814 U2.7
  Bottom Layer w0.254: P1.10 17.75,3.175 v1(20.4,5.825)
SPI_CS: U2.18 U3.2 | length 5.1
  Top Layer w0.203: U2.18 21.705,10.416 22.413,11.125 24.05,11.125 24.417,10.758 25.64,10.758 25.992,10.406 U3.2
SPI_MISO: U2.16 U3.5 | length 4.5
  Top Layer w0.203: U2.16 22.859,10.169 23.333,10.169 24.595,8.906 U3.5
SPI_MOSI: U2.17 U3.4 | length 5
  Top Layer w0.203: U2.17 22.505,10.522 23.421,10.522 24.696,9.247 25.82,9.247 25.979,9.406 U3.4
SPI_SCK: U2.15 U3.3 | length 6.3
  Top Layer w0.203: v1(21.871,8.474) 22.308,8.911 22.308,8.942 22.339,8.942 U2.15 ; v1(25.286,10.003) 25.374,9.915 26.208,9.915 U3.3
  Bottom Layer w0.203: v1(21.871,8.474) 23.399,10.003 v1(25.286,10.003)
SWCLK: P1.4 U2.37 | length 13.1
  Top Layer w0.254: v1(13.225,5.425) 13.225,5.573 13.113,5.685 13.113,6.08 U2.37
  Bottom Layer w0.254: P1.4 4.794,5.175 12.387,5.175 12.533,5.321 13.121,5.321 v1(13.225,5.425)
SWDIO: P1.2 U2.34 | length 18.1
  Top Layer w0.254: U2.34 v1(15.516,8.425)
  Bottom Layer w0.254: P1.2 3.891,5.542 12.112,5.542 12.674,6.105 14.328,6.105 15.516,7.292 v1(15.516,8.425)
USB_N: D1.3 U2.32 | length 7.5
  Top Layer w0.261: D1.3 9.27,9.417 10.092,9.417 10.433,9.075 10.65,9.075 10.853,9.278 11.647,9.278 13.263,10.895 14.435,10.895 14.816,10.515 14.841,10.515 U2.32
USB_P: D1.1 R3.1 U2.33 | length 7.3
  Top Layer w0.261: D1.1 9.193,7.779 10.092,7.779 10.978,8.665 10.978,8.747 11.046,8.814 11.839,8.814 13.456,10.43 14.243,10.43 14.487,10.186 14.487,10.161 U2.33
pads on no net: J1.4 J1.6 J1.7 J1.8 J1.9 J1.10 J1.11 P1.6 P1.7 P1.8 U2.1 U2.2 U2.3 U2.4 U2.10 U2.11 U2.12 U2.14 U2.20 U2.21 U2.22 U2.25 U2.26 U2.27 U2.28 U2.29 U2.30 U2.31 U2.38 U2.39 U2.40 U2.41 U2.42 U2.43 U3.21
copper on no net:
  other v2: 27.517,9.356 28.617,9.356 27.517,10.456 28.617,10.456

## Polygon pours and split planes (outlines as drawn)
GND on Top Layer "GND_L01_P002" (solid, pour order 2): 13.444,17.344 13.444,14.219 16.144,14.219 16.144,12.279 16.253,12.279 18.594,14.619 19.069,14.619 21.244,12.444 22.569,13.769 32.644,13.769 32.644,17.344
+3.3 on Top Layer "+3.3_L01_P000" (solid, pour order 0): 11.55,12.625 11.575,12.6 12.75,12.6 12.75,13.55 13.425,14.225 16.125,14.225 16.125,12.25 15.375,11.5 11.55,11.5
GND on Bottom Layer "GND_L04_P001" (solid, pour order 1): 32.975,17.425 32.975,11.6 32.475,11.1 29.025,11.1 29.025,8.95 27.575,8.95 27.575,5.1 22.45,-0.025 22.475,0 0,0 0,17.425
+3.3 on 3V3 (split plane): 32.998,11.95 32.999,11.945 32.992,11.839 32.97,11.73 32.935,11.625 32.885,11.525 32.824,11.433 32.751,11.349 32.667,11.276 32.575,11.215 32.475,11.165 32.37,11.13 32.261,11.108 32.155,11.101 32.15,11.102 26.85,11.102 26.798,11.095 26.749,11.075 26.707,11.043 26.675,11.001 26.655,10.952 26.648,10.9 26.648,0.51 0.51,0.51 0.51,16.915 32.998,16.915
no net on 3V3 (split plane): 49.655,0.51 27.052,0.51 27.052,10.698 32.15,10.698 32.29,10.706 32.429,10.729 32.563,10.768 32.693,10.822 32.816,10.89 32.931,10.971 33.035,11.065 33.129,11.169 33.21,11.284 33.278,11.407 33.332,11.537 33.371,11.671 33.394,11.81 33.402,11.95 33.402,16.915 49.655,16.915
GND on GND (split plane): 49.655,0.51 0.51,0.51 0.51,16.915 49.655,16.915

## Other copper
3V3 (plane layer: these items are gaps in the copper):
  lines w0.254: 26.375,-0.025 ccw(c26.375,0.05) 26.45,0.05 26.85,0.45 ; 33.2,16.925 cw(c33.7,16.925) 33.7,17.425
  lines w0.4: 26.85,0.45 26.85,10.9 32.15,10.9 ccw(c32.15,11.95) 33.2,11.95 33.2,16.925

## Text inside footprints (layer, text, board x,y; h text height)
J1: Mechanical 1 "PCB EDGE" at -0.106,16.471 h0.3 r270
P1: Top Overlay "2" at -0.341,2.94 h1.02; Top Overlay "1" at 0.059,1.14 h1.02; Top Overlay "10" at 7.769,2.94 h1.02; Top Overlay "9" at 7.769,1.14 h1.02